# Altium PCB PCB2.PcbDoc
Units mm, origin at the board's own origin, x right, y up, seen from the top; angles counter-clockwise.
Board outline 20.01 x 28.3 mm, 2 copper layers (Top Layer, Bottom Layer); 7 components, 8 nets, 26 pads, 71 vias.
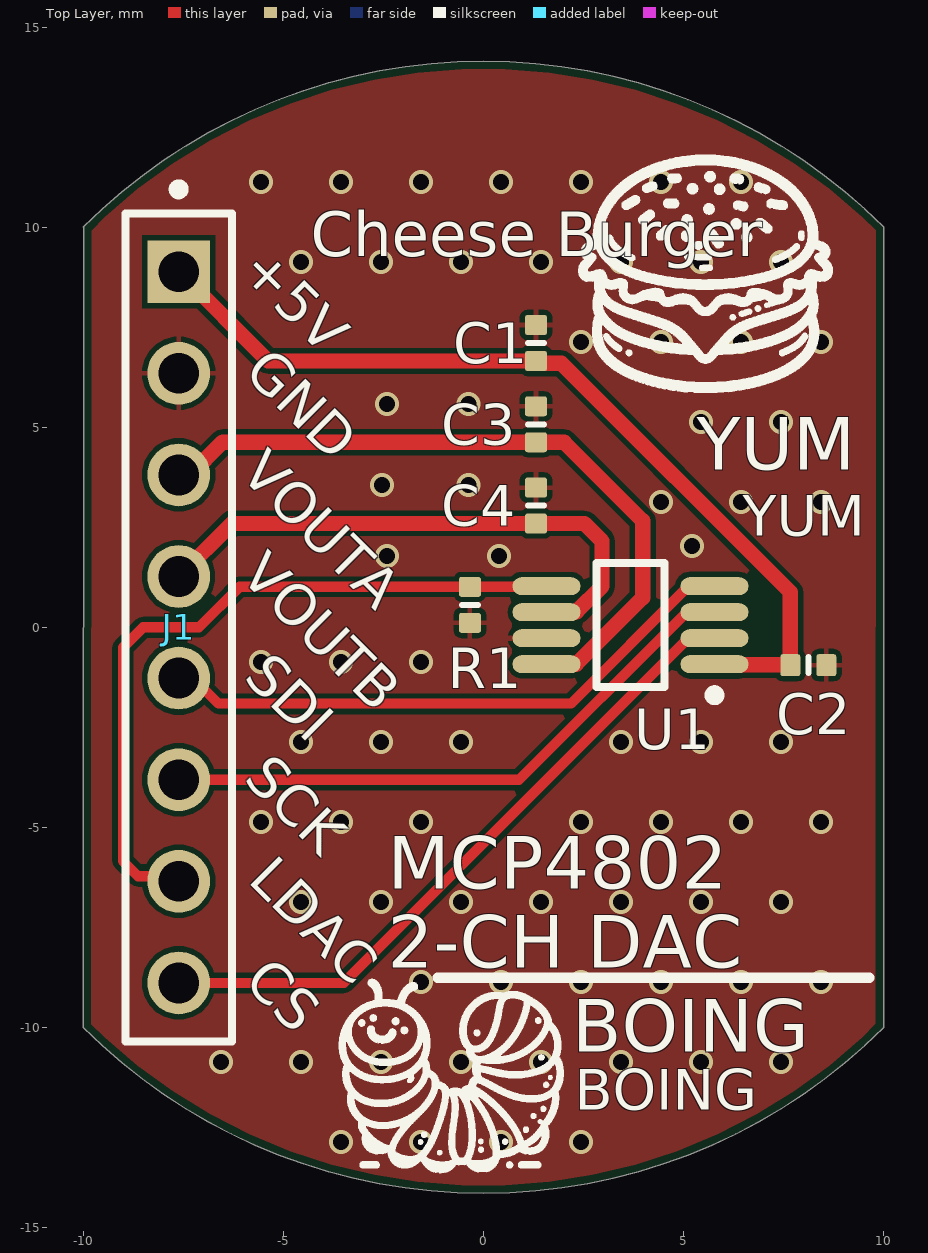
[diagram p0: Top Layer view]
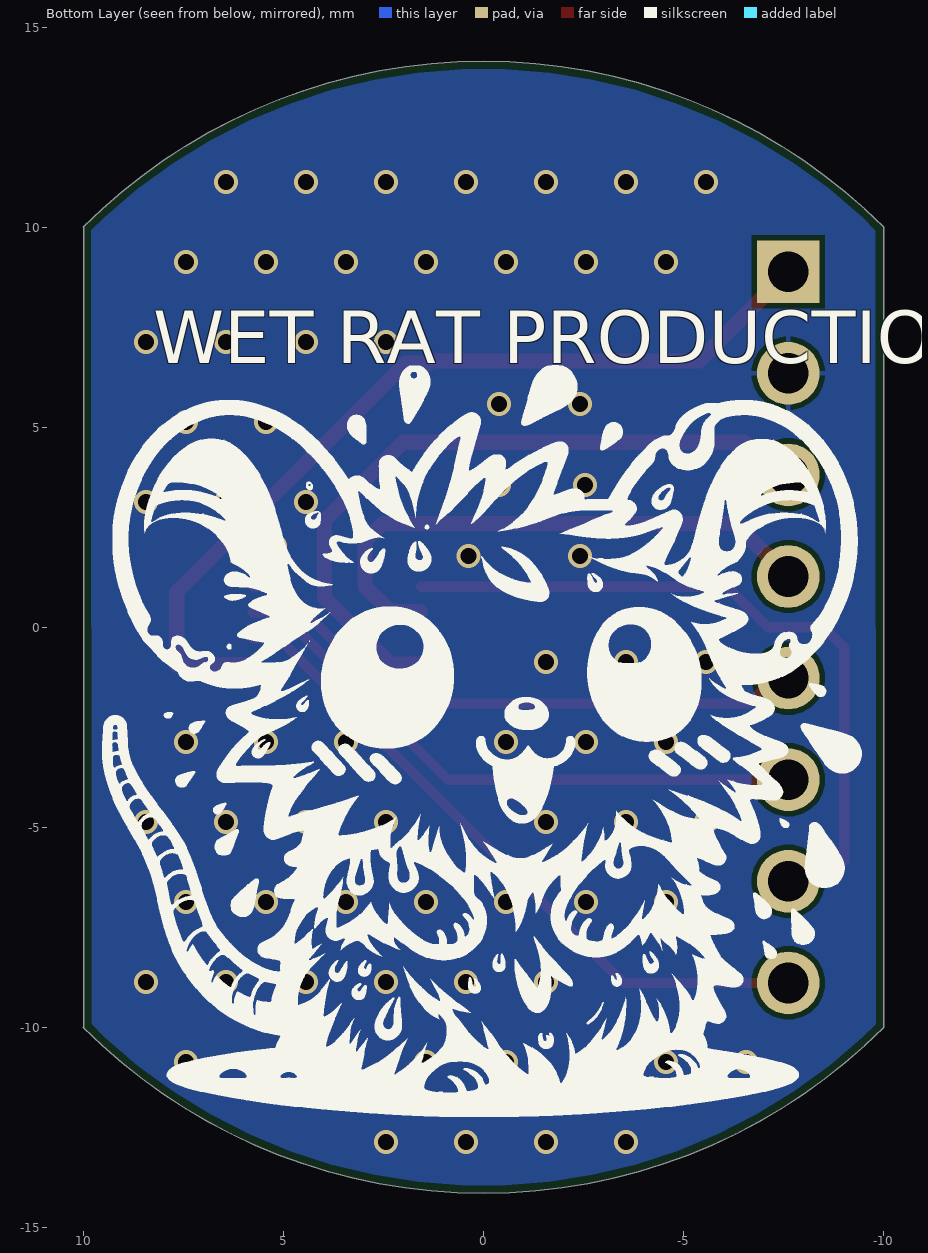
[diagram p1: Bottom Layer view, seen from below]
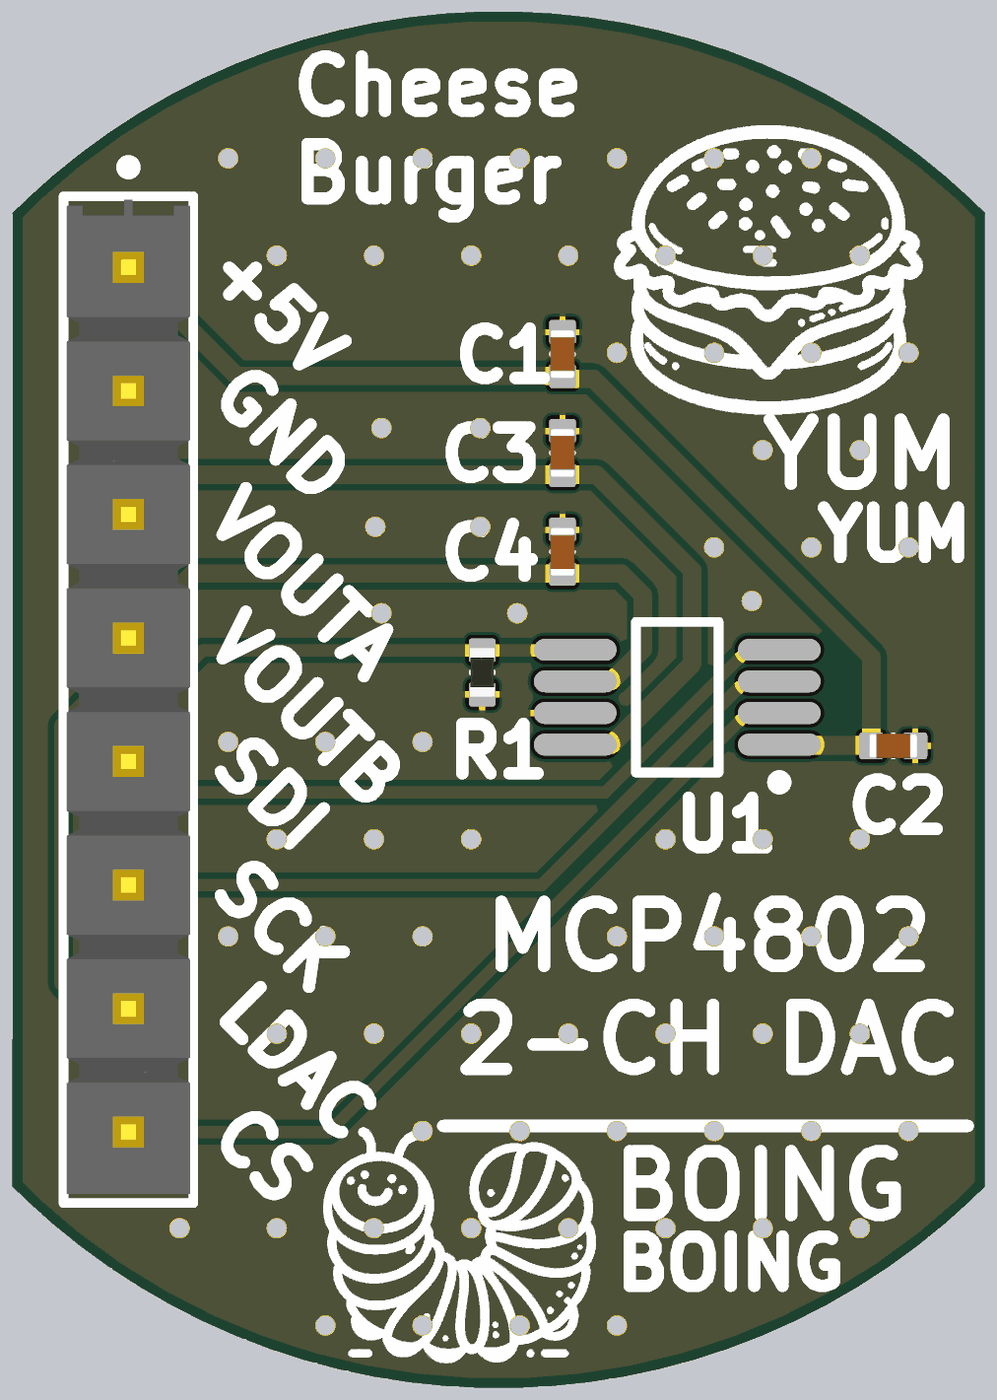
[diagram p2: 3D render of the assembled board from above, using the file's embedded part models]

## Layer stack, top to bottom
Top Solder: solder mask 0.0102, Solder Resist, Dk 3.5
Top Layer: signal copper 0.0356
Dielectric 1: dielectric 0.32, FR-4, Dk 4.8
Bottom Layer: signal copper 0.0356
Bottom Solder: solder mask 0.0102, Solder Resist, Dk 3.5

## Board outline
-10.006,-10.006 ccw(c0,0) 10.006,-10.006 10,-10 10,10 10.006,10.006 ccw(c0,0) -10.006,10.006 -10,10

## Design rules (kind name [scope] priority, off if disabled: settings)
BoardOutlineClearance [All] p1: gap=0.2 ignorepadtopadclearanceinfootprint=FALSE
Clearance [All] p1: gap=0.127 ignorepadtopadclearanceinfootprint=FALSE except(0.25: Arc-Hole Track-Hole SMDPad-Hole THPad-Hole Via-Hole Fill-Hole Poly-Hole Region-Hole Text-Hole)
ComponentClearance [All] p1: gap=0.127 collisioncheckmode=3 verticalgap=0.127 showdistances=TRUE
DiffPairsRouting [All] p1: maxlimit=0.254 minlimit=0.127 mostfreqgap=0.127 toplayer_minwidth=0.127 toplayer_maxwidth=25.4 toplayer_prefwidth=0.127 bottomlayer_minwidth=0.127 bottomlayer_maxwidth=25.4 bottomlayer_prefwidth=0.127 maxuncoupledlength=12.7
Height [All] p1: minheight=0 maxheight=1816.048 prefheight=12.7
HoleSize [All] p1: absolutevalues=TRUE maxlimit=6.3 minlimit=0.3 maxpercent=80.000 minpercent=20.000
HoleToHoleClearance [All] p1: gap=0.25 allowstackedmicrovias=FALSE
MinimumAnnularRing [All] p1: minimumring=0.076
MinimumSolderMaskSliver [All] p1: minsoldermaskwidth=0
PlaneClearance [All] p1: clearance=0.127
PlaneConnect PlaneConnectPowerPads [InPadClass('PowerPads')] p1: planeconnectstyle=Direct reliefexpansion=0.508 reliefentries=4 reliefconductorwidth=0.254 reliefairgap=0.254
PlaneConnect [All] p2: pad.planeconnectstyle=Relief pad.reliefexpansion=0.3 pad.reliefentries=4 pad.reliefconductorwidth=0.127 pad.reliefairgap=0.127 via.planeconnectstyle=Direct via.reliefexpansion=0.3 via.reliefentries=4 via.reliefconductorwidth=0.127 via.reliefairgap=0.127
PolygonConnect PolygonConnectPowerPads [All vs (InPadClass('PowerPads'))] p1: connectstyle=Direct reliefconductorwidth=0.254 reliefentries=4 polygonreliefangle="90 Angle" airgapwidth=0.254
PolygonConnect [All] p2: thpad.connectstyle=Relief thpad.reliefconductorwidth=0.127 thpad.reliefentries=4 thpad.polygonreliefangle="90 Angle" thpad.airgapwidth=0.127 smdpad.connectstyle=Relief smdpad.reliefconductorwidth=0.127 smdpad.reliefentries=4 smdpad.polygonreliefangle="90 Angle" smdpad.airgapwidth=0.127 via.connectstyle=Direct via.reliefconductorwidth=0.127 via.reliefentries=4 via.polygonreliefangle="90 Angle" via.airgapwidth=0.127
RoutingVias [All] p1: holewidth=0.3 width=0.6 viastyle="Through Hole" minholewidth=0.3 minwidth=0.6 maxholewidth=0.6 maxwidth=6.6
SilkToSilkClearance [All] p1: silktosilkclearance=0
SilkToSolderMaskClearance [IsPad] p1: minsilkscreentomaskgap=0.127 clearancetoexposedcopper=TRUE
SolderMaskExpansion [All] p1: expansion=0.075 istentingtop=FALSE
Width [All] p1: maxlimit=25.4 minlimit=0.127 preferedwidth=0.127 minimp=50.000000 maximp=50.000000 favimp=50.000000
20 further rules are at their usual default settings.

## Components (designator, comment, footprint, x,y, rotation, side; value= is the part's Value field where it differs from the comment)
C1 "Capacitor 1µF +/-20% 10V 0402" CAPC0402(1005)60_L 1.311,7.108 r90 top value=1µF
C2 "Capacitor 100nF +/-20% 25V 0402" CAPC0402(1005)60_L 8.119,-0.948 r0 top value=100nF
C3 "Capacitor 1µF +/-20% 10V 0402" CAPC0402(1005)60_L 1.311,5.076 r90 top value=1µF
C4 "Capacitor 1µF +/-20% 10V 0402" CAPC0402(1005)60_L 1.311,3.044 r90 top value=1µF
J1 "TSW-108-08-G-S" FP-TSW-108-08-G-S-MFG -7.62,0 r270 top
R1 "0R2J" RESC0402(1005)_L -0.34,0.562 r270 top value=0
U1 "MCP4802-E/MS" MSOP-MS8_N 3.674,0.052 r180 top

## Footprints (in the part's own frame and the unit in brackets; to place one, negate y for a bottom-side part, rotate by r counter-clockwise, add the part's x,y. Pads: shape width x height; smd on the part's side, far side on the other; paste and mask are expansions set on the pad)
CAPC0402(1005)60_L [mm] "Chip Capacitor, Body 1.0x0.5mm, Height 0.6mm, IPC High Density"
  rrect25% 0.5x0.55 smd: 1(-0.45,0) 2(0.45,0)
  silkscreen extent 0,-0.2 0,0.2, body extent -0.5,-0.25 0.5,0.25, height 0.6
FP-TSW-108-08-G-S-MFG [mm]
  rect 1.57x1.57 hole 1.02 paste-1000 mask+0: 1(-8.89,0)
  round 1.57 hole 1.02 paste-1000 mask+0: 2(-6.35,0) 3(-3.81,0) 4(-1.27,0) 5(1.27,0) 6(3.81,0) 7(6.35,0) 8(8.89,0)
  silkscreen extent -11.07,-1.34 10.35,1.34, body extent -10.45,-1.44 10.45,1.44, height 0.25
MSOP-MS8_N [mm] "TSOP, 8-Leads, Body 3x3mm, Pitch 0.65mm, IPC Medium Density"
  oval 1.7x0.45 smd: 1(-2.1,0.975) 2(-2.1,0.325) 3(-2.1,-0.325) 4(-2.1,-0.975) 5(2.1,-0.975) 6(2.1,-0.325) 7(2.1,0.325) 8(2.1,0.975)
  silkscreen extent -2.22,-1.55 0.85,1.87, body extent -1.55,-1.55 1.55,1.55, height 1.1
RESC0402(1005)_L [mm] "Chip Resistor, Body 1.0x0.5mm, IPC High Density"
  rrect25% 0.5x0.55 smd: 1(-0.45,0) 2(0.45,0)
  silkscreen extent 0,-0.2 0,0.2, body extent -0.5,-0.25 0.5,0.25, height 0.3

## Part data
C1 C3 C4: library part CMP-001-00063-3, "Chip Capacitor, 1µF +/-20%, 10V, 0402, Thickness 0.6 mm", Case/Package=0402, Max Operating Temperature=85°C, Min Operating Temperature=-55°C, Tolerance=10%, Voltage Rating=10V, Mounting Technology=SMT, Pins=2
C2: library part CMP-001-00065-4, "Chip Capacitor, 100nF +/-20%, 25V, 0402, Thickness 0.6 mm", Case/Package=0402, Max Operating Temperature=85°C, Min Operating Temperature=-55°C, Tolerance=10%, Voltage Rating=25V, Mounting Technology=SMT, Pins=2
J1: library part CMP-002-00076-1, "TSW - Samtec 2.54mm Pin Header 13.46mm Overall Pin Length 5.08mm Tail (08) (mcv)(TO22)", Color=Black, Max Current Rating=7.6A, Max Operating Temperature=125°C, Max Voltage Rating (AC)=550V, Min Operating Temperature=-55°C, Contact Material=Bronze, Contact Mating Length=0.23inch, Contact Plating=Gold, Contact Type="Male Pin", Depth=2.54mm, Gender=Male, Housing Color=Black, Housing Material=Polyester, Lead Free="Lead Free", Length=20.32mm, Mounting Technology="Through Hole", Number of Contacts=8, Number of Positions=8, Number of Rows=1, Orientation=Straight, Packaging=Bulk, Pitch=2.54mm, Radiation Hardening=No, Reach SVHC Compliant=No, RoHS Compliant=Yes, Series=TSW, Termination=Solder, Width=2.54mm
R1: library part CMP-009-00062-2, "Jumper 0402 (1005 Metric)", Case/Package=0402, Mounting Technology=SMT, Pins=2
U1: library part CMP-001-0001-1, "DAC 2-CH Resistor-String 8-bit Automotive 8-Pin MSOP Tube", Case/Package=MSOP, Input Offset Voltage (Vos)=820uV, Max Operating Temperature=125°C, Max Supply Voltage=5.5V, Min Operating Temperature=-40°C, Min Supply Voltage=2.7V, Operating Supply Voltage=5V, Package Quantity=100, Reference Voltage=2.048V, Supply Current=415uA, Height=0.95mm, Integral Nonlinearity (INL)=1LSB, Interface=SPI,Serial,3-WIRE, Lead Free="Lead Free", Length=3mm, Mounting Technology="Surface Mount", Number of Bits=8, Number of Channels=2, Number of Converters=1, Number of DAC Channels=2, Output Polarity=Bipolar, Output Type=Voltage, Packaging=Rail/Tube, Pins=8, Radiation Hardening=No, Reach SVHC Compliant=No, Resolution=8b, RoHS Compliant=Yes, Settling Time=4.5us, Width=3mm

## Via types
v1: diameter 0.6, hole 0.4, Top Layer to Bottom Layer, tented both sides, 71 vias

## Nets (pads, with @x,y where several pads share a name; then routed paths per layer and width w, separated by ;. In a path a pad name is that pad's centre, name@x,y a point inside that pad or via, vN(x,y) a via of type N, cw(c..) or ccw(c..) an arc to the next point about the centre after c; other vN are vias at no path point)
CS: J1.8 U1.2 | length 17
  Top Layer w0.254: J1.8 -3.495,-8.89 5.122,-0.273 U1.2
LDAC: J1.7 R1.1 U1.5 | length 18.2
  Top Layer w0.254: J1.7 -7.747,-6.223 -8.636,-6.223 -9.017,-5.842 -9.017,-0.508 -8.509,0 -7.112,0 -6.096,1.016 -6.092,1.012 R1.1 U1.5@1.559,1.012
SCK: J1.6 U1.3 | length 15.1
  Top Layer w0.254: J1.6 0.889,-3.81 4.978,0.279 4.998,0.279 5.096,0.377 U1.3
SDI: J1.5 U1.4 | length 14.9
  Top Layer w0.254: J1.5 -7.264,-1.27 -6.625,-1.909 2.185,-1.909 5.122,1.027 U1.4
VDD: C1.1 C2.1 J1.1 U1.1 | length 22.3
  Top Layer w0.381: J1.1 -5.388,6.658 C1.1 1.369,6.6 1.946,6.6 7.669,0.878 C2.1 7.656,-0.935 5.786,-0.935 U1.1
VOUTA: C3.1 J1.3 U1.8 | length 17.8
  Top Layer w0.381: J1.3@-7.591,3.839 J1.3 -7.342,3.81 -6.522,4.63 -6.518,4.626 C3.1 2.016,4.626 3.978,2.663 3.978,0.739 2.316,-0.923 U1.8 U1.8@1.587,-0.91
VOUTB: C4.1 J1.4 U1.6 | length 14.1
  Top Layer w0.381: J1.4 -6.292,2.598 -6.288,2.594 C4.1 2.523,2.594 2.962,2.155 2.962,1.023 2.329,0.39 1.587,0.39 U1.6
VSS: C1.2 C2.2 C3.2 C4.2 J1.2 R1.2 U1.7
  other v1: -3.568,-12.867 -1.568,-12.867 0.432,-12.867 2.432,-12.867 -6.568,-10.867 -4.568,-10.867 -2.568,-10.867 -0.568,-10.867 1.432,-10.867 3.432,-10.867 5.432,-10.867 7.432,-10.867 -1.568,-8.867 0.432,-8.867 2.432,-8.867 4.432,-8.867 6.432,-8.867 8.432,-8.867 -4.568,-6.867 -2.568,-6.867 -0.568,-6.867 1.432,-6.867 3.432,-6.867 5.432,-6.867 7.432,-6.867 -5.568,-4.867 -3.568,-4.867 -1.568,-4.867 2.432,-4.867 4.432,-4.867 6.432,-4.867 8.432,-4.867 -4.568,-2.867 -2.568,-2.867 -0.568,-2.867 3.432,-2.867 5.432,-2.867 7.432,-2.867 -5.568,-0.867 -3.568,-0.867 -1.568,-0.867 -2.413,1.778 0.381,1.778 5.207,2.032 4.432,3.133 6.432,3.133 8.432,3.133 -2.54,3.556 -0.381,3.556 5.432,5.133 7.432,5.133 -2.413,5.588 -0.381,5.588 2.432,7.133 4.432,7.133 6.432,7.133 8.432,7.133 -4.568,9.133 -2.568,9.133 -0.568,9.133 1.432,9.133 3.432,9.133 5.432,9.133 7.432,9.133 -5.568,11.133 -3.568,11.133 -1.568,11.133 0.432,11.133 2.432,11.133 4.432,11.133 6.432,11.133

## Polygon pours and split planes (outlines as drawn)
VSS on Top Layer "VSS_L01_P000" (solid, pour order 0): -12.065,15.367 -12.065,-15.494 12.573,-15.494 12.573,15.494
VSS on Bottom Layer "VSS_L02_P001" (solid, pour order 1): -13.208,15.113 -13.208,-16.002 13.589,-16.002 13.589,15.113

## Silkscreen, mask and mechanical layers (free items; w line width, h text height)
Top Overlay:
  drawing of 57 lines, arcs and shapes, not listed
  text "Cheese Burger" at -4.318,9.271 h1.12
  text "+5V" at -6.118,8.89 h1.02 r315
  text "GND" at -6.018,6.35 h1.02 r315
  text "YUM" at 5.334,3.937 h1.32
  text "VOUTA" at -6.118,3.81 h1.02 r315
  text "YUM" at 6.477,2.286 h1.02
  text "VOUTB" at -6.118,1.27 h1.02 r315
  text "SDI" at -6.018,-1.27 h1.02 r315
  text "SCK" at -6.018,-3.81 h1.02 r315
  text "LDAC" at -5.918,-6.35 h1.02 r315
  text "MCP4802 / 2-CH DAC" at -2.39,-8.509 h1.32
  text "CS" at -6.018,-8.89 h1.02 r315
  text "BOING" at 2.217,-10.61 h1.32
  text "BOING" at 2.286,-12.065 h1.02
Bottom Overlay:
  drawing of 54 lines, arcs and shapes, not listed
  text "WET RAT PRODUCTIONS" at 8.255,6.604 h1.32
Mechanical 1:
  lines w0.1: -10.006,-10.006 ccw(c0,0) 10.006,-10.006 ; -10.006,10.006 cw(c0,0) 10.006,10.006 ; -10,-10 -10,10 ; 10,-10 10,10